# Altium PCB PCB1.PcbDoc
Units mm, origin at the board's own origin, x right, y up, seen from the top; angles counter-clockwise.
Board outline 57.4 x 41.02 mm, 2 copper layers (Top Layer, Bottom Layer); 11 components, 7 nets, 26 pads, 0 vias.
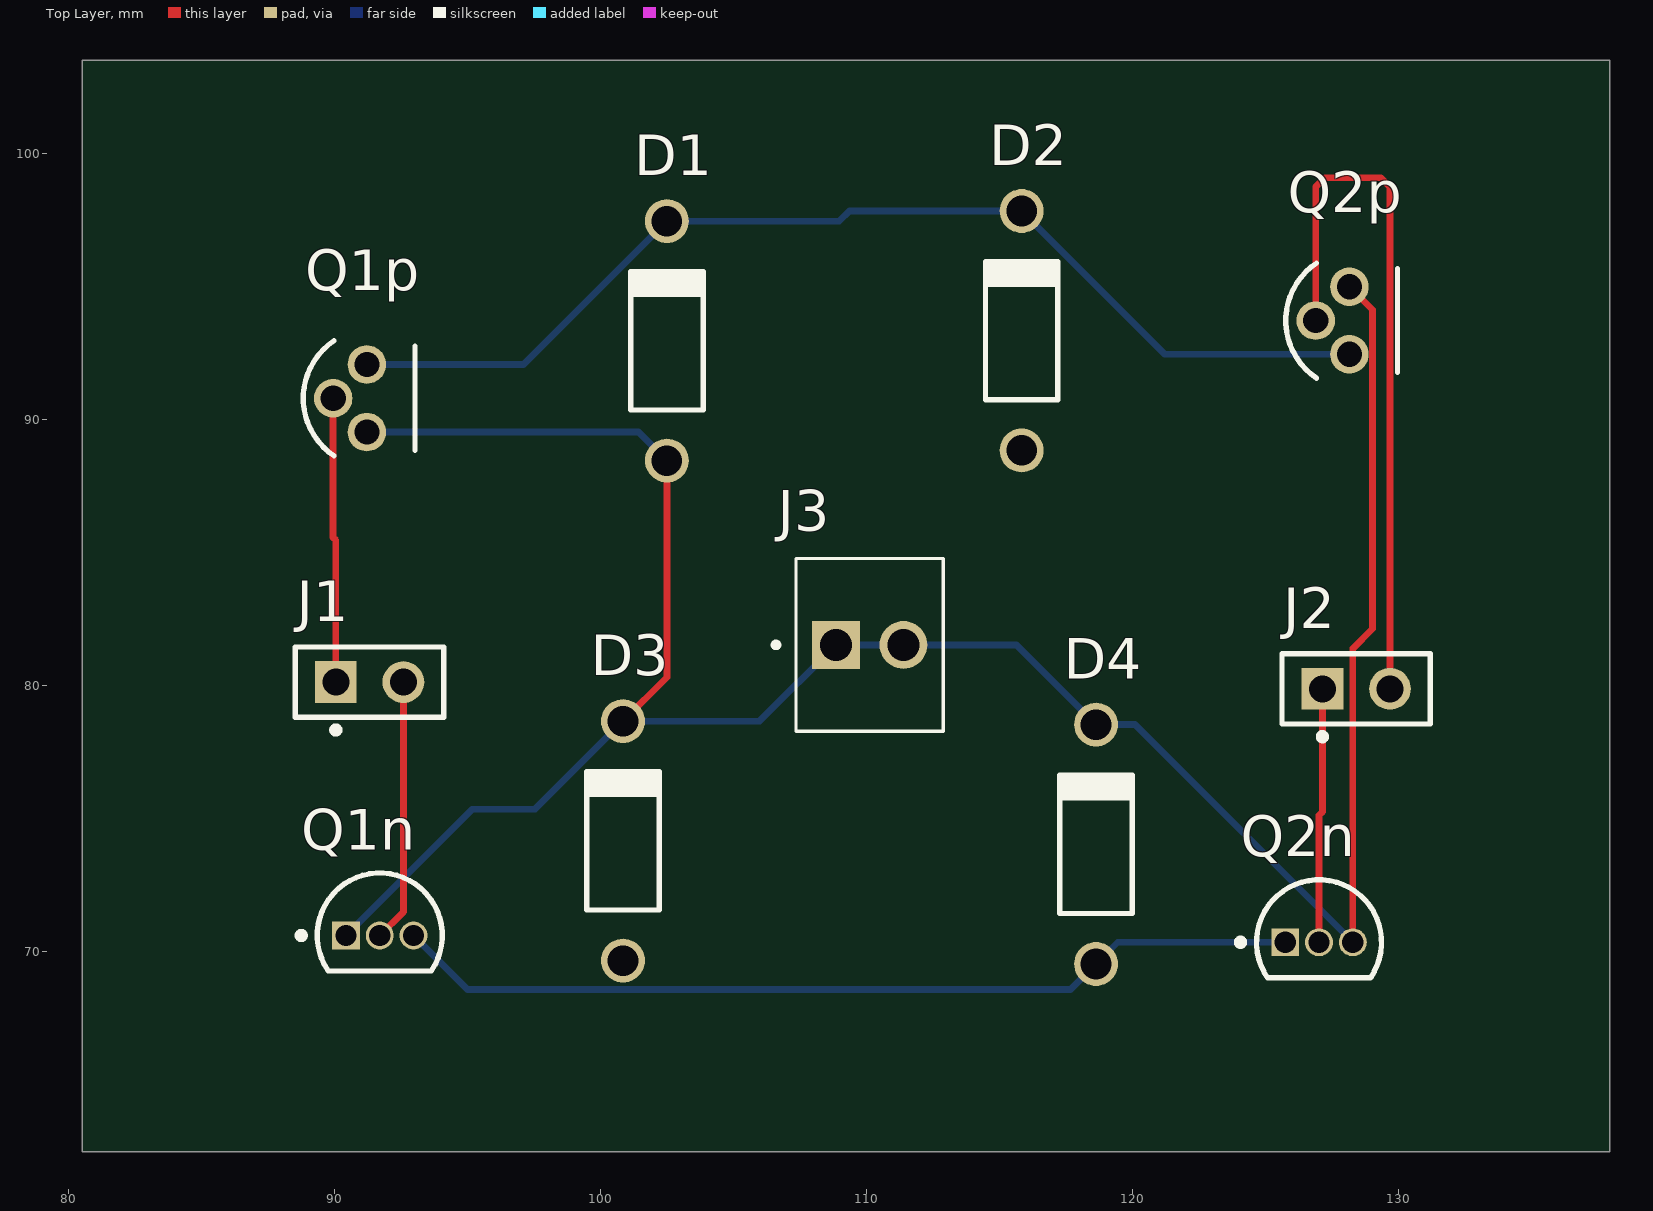
[diagram p0: Top Layer view]
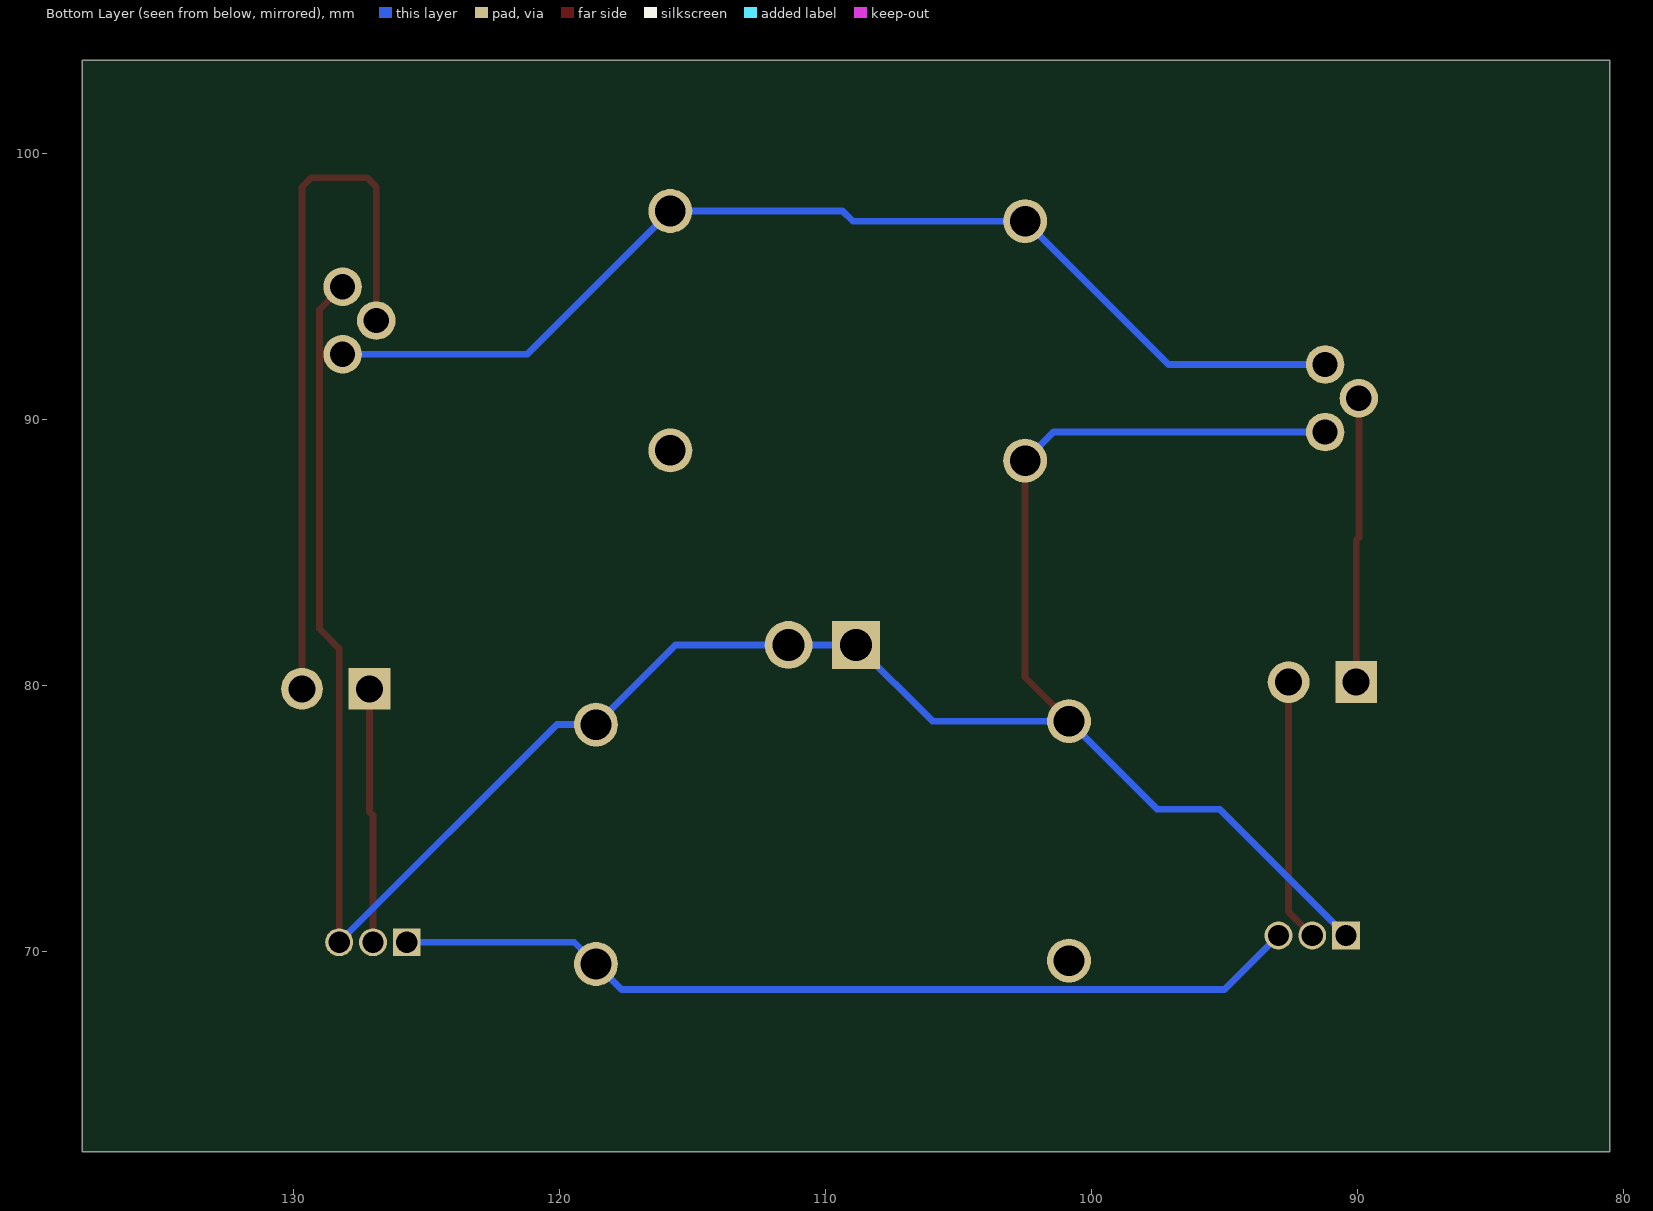
[diagram p1: Bottom Layer view, seen from below]

## Layer stack, top to bottom
Top Solder: solder mask 0.0102, Solder Resist, Dk 3.5
Top Layer: signal copper 0.0356
Dielectric 1: dielectric 0.32, FR-4, Dk 4.8
Bottom Layer: signal copper 0.0356
Bottom Solder: solder mask 0.0102, Solder Resist, Dk 3.5

## Board outline
80.518,62.484 137.922,62.484 137.922,103.505 80.518,103.505

## Design rules (kind name [scope] priority, off if disabled: settings)
Clearance [All] p1: gap=0.01 ignorepadtopadclearanceinfootprint=FALSE
PolygonConnect [All] p1: connectstyle=Relief reliefconductorwidth=0.254 reliefentries=4 polygonreliefangle="90 Angle" airgapwidth=0.254
RoutingVias [All] p1: holewidth=0.711 width=1.27 viastyle="Through Hole" minholewidth=0.711 minwidth=1.27 maxholewidth=0.711 maxwidth=1.27
SolderMaskExpansion [All] p1: expansion=0.102 istentingtop=FALSE
UnRoutedNet [All] p1: checkbadconnections=TRUE
Width [All] p1: maxlimit=0.254 minlimit=0.254 preferedwidth=0.254
29 further rules are at their usual default settings.

## Classes and differential pairs
component class Sheet1: J1 J2 J3 Q1p Q2p

## Components (designator, comment, footprint, x,y, rotation, side; value= is the part's Value field where it differs from the comment)
D1 "1N4732A" FAIR-DO-41-2_V 102.489,92.964 r90 top
D2 "1N4732A" FAIR-DO-41-2_V 115.824,93.345 r90 top
D3 "1N4732A" FAIR-DO-41-2_V 100.838,74.168 r90 top
D4 "1N4732A" FAIR-DO-41-2_V 118.618,74.041 r90 top
J1 "M20-9990245" FP-M20-9990245-MFG 91.313,80.137 r0 top
J2 "M20-9990245" FP-M20-9990245-MFG 128.397,79.883 r0 top
J3 "282834-2" TE_282834-2 110.109,81.534 r0 top
Q1n "BS170" ONSC-TO-92-3-29-11 91.694,70.612 r0 top
Q1p "VP2450N3-G" FP-N3-MFG 90.932,90.805 r0 top
Q2n "BS170" ONSC-TO-92-3-29-11 127,70.358 r0 top
Q2p "VP2450N3-G" FP-N3-MFG 127.864,93.726 r0 top

## Footprints (in the part's own frame and the unit in brackets; to place one, negate y for a bottom-side part, rotate by r counter-clockwise, add the part's x,y. Pads: shape width x height; smd on the part's side, far side on the other; paste and mask are expansions set on the pad)
FAIR-DO-41-2_V [mm] "2-Leads, Axial leaded, Body 2.72x5.2mm, Pin Spacing 9mm"
  round 1.65 hole 1.15: 1(-4.5,0) 2(4.5,0)
  silkscreen extent -2.6,-1.36 2.6,1.36, body extent -4.93,-1.36 4.93,1.36, height 2.71
FP-M20-9990245-MFG [mm]
  rect 1.57x1.57 hole 1.02 paste-2539.97 mask+0: 1(-1.27,0)
  round 1.57 hole 1.02 paste-2539.97 mask+0: 2(1.27,0)
  silkscreen extent -2.79,-1.92 2.79,1.32, body extent -2.89,-1.42 2.89,1.42, height 0.25
FP-N3-MFG [mm]
  round 1.45 hole 0.95 paste-2539.97 mask+0: 1(0.279,-1.27) 2(-0.991,0) 3(0.279,1.27)
  silkscreen extent -2.11,-2.16 2.09,2.16, body extent -2.2,-2.7 2.2,2.7, height 0.25
ONSC-TO-92-3-29-11 [mm] "TO, 3-Leads, Body Dia 4.7mm, Pitch 1.27mm"
  rect 1.05x1.05 hole 0.8: 1(-1.27,0)
  round 1.05 hole 0.8: 2(0,0) 3(1.27,0)
  silkscreen extent -3.07,-1.34 2.35,2.35, body extent -2.35,-1.33 2.36,2.36, height 7.87
TE_282834-2 [mm]
  rect 1.8x1.8 / inner round 1.8 / far side rect 1.8x1.8 hole 1.2: 1(-1.27,0)
  round 1.8 hole 1.2: 2(1.27,0)
  silkscreen extent -3.62,-3.25 2.77,3.25

## Part data
D1 D2 D3 D4: library part CMP-0892-00030-1, "Zener Diode, 4.7V, 1W, 5%, -65 to 200 degC, 2-Pin DO-41, Body 2.72 x 5.2 mm, RoHS", Manufacturer="Fairchild Semiconductor", Operating and Storage Temperature Range="-65 to 200 degC", Test Current IZ (mA)=53, Tolerance=5%, ComponentLink1Description="Manufacturer URL", ComponentLink1URL=http://www.fairchildsemi.com/, ComponentLink2Description=Datasheet, ComponentLink2URL=http://www.fairchildsemi.com/ds/1N/1N4744A.pdf, ComponentLink3Description="Package Specification", ComponentLink3URL=http://www.fairchildsemi.com/dwg/DO/DO41A.pdf, DatasheetVersion="Rev. H3", IR (uA)=10, Mounting Technology="Through Hole", PackageDescription="2-Pin Axial leaded, Body 2.72 x 5.2 mm, Lead Spread 25.4 mm", PackageReference=DO-41-2, PackageVersion="Rev. 2", PartNumber=1N4732A, PD (W)=1, RoHS=TRUE, VZ (Max.) (V)=4.935, VZ (Min.) (V)=4.465, ZZ (Max) (ohm)=8
J1 J2: library part CMP-15831-000105-1, "CONN HEADER VERT 2POS 2.54MM", Case/Package=SIL, Color=Black, Contact Resistance=25mR, Current=3A, Flammability Rating="UL94 V-0", Insulation Resistance=10GR, Max Operating Temperature=105°C, Min Operating Temperature=-40°C, Package Quantity=1000, Voltage=50V, Voltage Rating (AC)=750V, Connector Type="Male Pin", Contact Finish - Mating=GOLD, Contact Material=Brass, Contact Mating Length=0.24inch, Contact Plating=Gold, Contact Shape=Square, Contact Type="Male Pin", Current Rating=3A, Depth=2.54mm, Fastening Type=Pull, Gender=Male, Height=0.12inch, Housing Color=Black, Housing Material=Nylon, Insulation Color=Black, Insulation Material=Nylon, Lead Pitch=2.54mm, Length=5.08mm, Mated Stacking Heights=16.54mm, Mating Cycles=300, Max Current Rating=3A, Mount="Through Hole", Number of Contacts=2, Number of Poles=2, Number of Positions=2, Number of Rows=1, Orientation=Straight, Packaging=Bulk, Pitch=2.54mm, Radiation Hardening=No, Reach SVHC Compliant=Yes, Series=M20, Termination=Solder, Weight=0.25lb, Width=0.25inch, Working Voltage=750V
J3: Package=None, Availability=Unavailable, MF="{'manufacturer': u'TE Connectivity'}", MP=282834-2, Price=None
Q1n Q2n: library part CMP-1058-00929-1, "Small Signal MOSFET, 500 mA, 60 V, N-Channel, 3-Pin TO-92, Bulk Box", Manufacturer="On Semiconductor", Package Type=TO-92, Channel Polarity="N Channel", ComponentLink1Description="Manufacturer URL", ComponentLink1URL=http://www.onsemi.com/, ComponentLink2Description=Datasheet, ComponentLink2URL=http://www.onsemi.com/pub_link/Collateral/BS170-D.PDF, ComponentLink3Description="Package Specification", ComponentLink3URL=http://www.onsemi.cn/pub_link/Collateral/2N6426-D.PDF, Configuration=Single, DatasheetVersion="Rev. 6", ID Max (A)=0.5, Mounting Technology="Through Hole", PackageDescription="3-Pin Transistor Outline, Body 4.825 x 3.685 mm, Pitch 1.27 mm", PackageReference=TO-92-3-29-11_AM_SL, PackageVersion="Rev. AM", Packing="Bulk Box", PartNumber=BS170, PD Max (W)=0.35, V(BR)DSS Min (V)=60, VGS Max (V)=20, VGS(th) Max (V)=3
Q1p Q2p: library part CMP-00252-47153691-1, "VP2450N3-G Transistor MOSFET P-CH 500V 0.1A 3-Pin TO-92", Ambient Temperature Range High=150°C, Case/Package=TO-92, Continuous Drain Current (ID)=-100mA, Drain to Source Breakdown Voltage=-500V, Drain to Source Resistance=30Ω, Gate to Source Voltage (Vgs)=20V, Input Capacitance=190pF, Max Power Dissipation=740mW, Min Operating Temperature=-55°C, Power Dissipation=1W, Drain to Source Voltage (Vdss)=-500V, Element Configuration=Single, Fall Time=25ns, Height=5.33mm, Length=5.21mm, Lifecycle Status=Production, Max Operating Temperature=150°C, Mount="Through Hole", NexarPartId=47153691, Number Of Channels=1, Number of Elements=1, Number of Pins=3, Packaging=Bulk, Radiation Hardening=No, Rds On Max=30Ω, Rise Time=25ns, RoHS=Compliant, Schedule B=8541290080, Turn-Off Delay Time=45ns, Turn-On Delay Time=10ns, Weight=453.59237mg, Width=4.19mm

## Nets (pads, with @x,y where several pads share a name; then routed paths per layer and width w, separated by ;. In a path a pad name is that pad's centre, name@x,y a point inside that pad or via, vN(x,y) a via of type N, cw(c..) or ccw(c..) an arc to the next point about the centre after c; other vN are vias at no path point)
+12: D1.2 D2.2 Q1p.3 Q2p.1 | length 41.6
  Bottom Layer w0.254: Q1p.3 97.1,92.075 D1.2 108.966,97.464 109.347,97.845 D2.2 121.213,92.456 Q2p.1
GND: D4.1 Q1n.3 Q2n.1 | length 34.3
  Bottom Layer w0.254: Q1n.3 94.996,68.58 117.657,68.58 D4.1 119.435,70.358 Q2n.1
NetD1_1: D1.1 D3.2 D4.2 J3.1 J3.2 Q1n.1 Q1p.1 Q2n.3 Q2p.3 | length 94.5
  Top Layer w0.254: D3.2 102.489,80.319 D1.1 ; Q2p.3 129.007,94.132 129.007,82.144 128.27,81.407 Q2n.3
  Bottom Layer w0.254: Q1n.1 95.174,75.362 97.532,75.362 D3.2 105.973,78.668 J3.1 J3.2 115.625,81.534 D4.2 120.087,78.541 Q2n.3 ; Q1p.1 101.418,89.535 D1.1
NetJ1_1: J1.1 Q1p.2 | length 10.7
  Top Layer w0.254: Q1p.2 89.941,85.573 90.043,85.471 J1.1
NetJ1_2: J1.2 Q1n.2 | length 9.9
  Top Layer w0.254: Q1n.2 92.583,71.501 J1.2
NetJ2_1: J2.1 Q2n.2 | length 9.6
  Top Layer w0.254: Q2n.2 127,75.133 127.127,75.26 J2.1
NetJ2_2: J2.2 Q2p.2 | length 27
  Top Layer w0.254: Q2p.2 126.873,98.742 127.229,99.098 129.311,99.098 129.667,98.742 J2.2
pads on no net: D2.1 D3.1